# EAGLE board rgb-breakout (EAGLE 9.6.1)
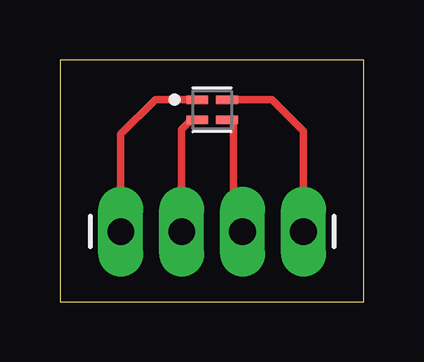
[diagram p0: board, top side]

Size 12.68 x 10.08 mm. Coordinates in mm from the lower left corner, seen from the top.
Outline: 0,0 12.68,0 12.68,10.08 0,10.08 0,0
Copper layers (1*16): Top 0.035mm / dielectric 1.5mm / Bottom 0.035mm
Design rules "default": minimum track width 6mil, minimum drill 0.35mm, track to track 6mil, track to pad 6mil, pad to pad 6mil, via to via 6mil, smd to smd 6mil, copper to edge 40mil, drill to drill 6mil, minimum pad ring 10mil, minimum via ring 8mil, stop-mask expansion 4mil, vias tented up to drill 0mil, thermal gap 10mil

## Footprints (pad centres in the part's own frame; a part is rotated, then mirrored left to right if it is on the bottom)
1X04_LONGPADS = drill 1.118 pad 1.88 long: 1 0,0; 2 2.54,0; 3 5.08,0; 4 7.62,0
DIODFN160X160X120-4N = smd 0.91 x 0.352: 1 -0.62,0.425; 2 -0.62,-0.425; 3 0.62,-0.425; 4 0.62,0.425

## Placement (x,y rotation side)
J1  [1X04_LONGPADS]  2.54,2.92 0 top
U$1  XZCMEDGCBD110W-RGBXZCMEDGCBD110W-RGB  [DIODFN160X160X120-4N]  6.35,8 0 top

## Library data of the parts
J1 = connector; PROD_ID: CONN-09696
U$1 = leds

## Nets
BLUE: J1.4 U$1.4
GREEN: J1.3 U$1.3
RED: J1.2 U$1.2
VCC: J1.1 U$1.1

## Tracks (layer width: path | path; a pad name or v marks a point on that pad's centre or on a via)
BLUE
  Top 0.305: U$1.4 8.85,8.43 10.16,7.11 J1.4
GREEN
  Top 0.305: U$1.3 7.22,7.58 7.24,7.56 7.24,3.3 J1.3
RED
  Top 0.305: J1.2 5.08,7.18 5.48,7.58 U$1.2
VCC
  Top 0.305: J1.1 2.54,6.99 3.98,8.43 U$1.1